# EAGLE board board-v3 (EAGLE 6.5.0)
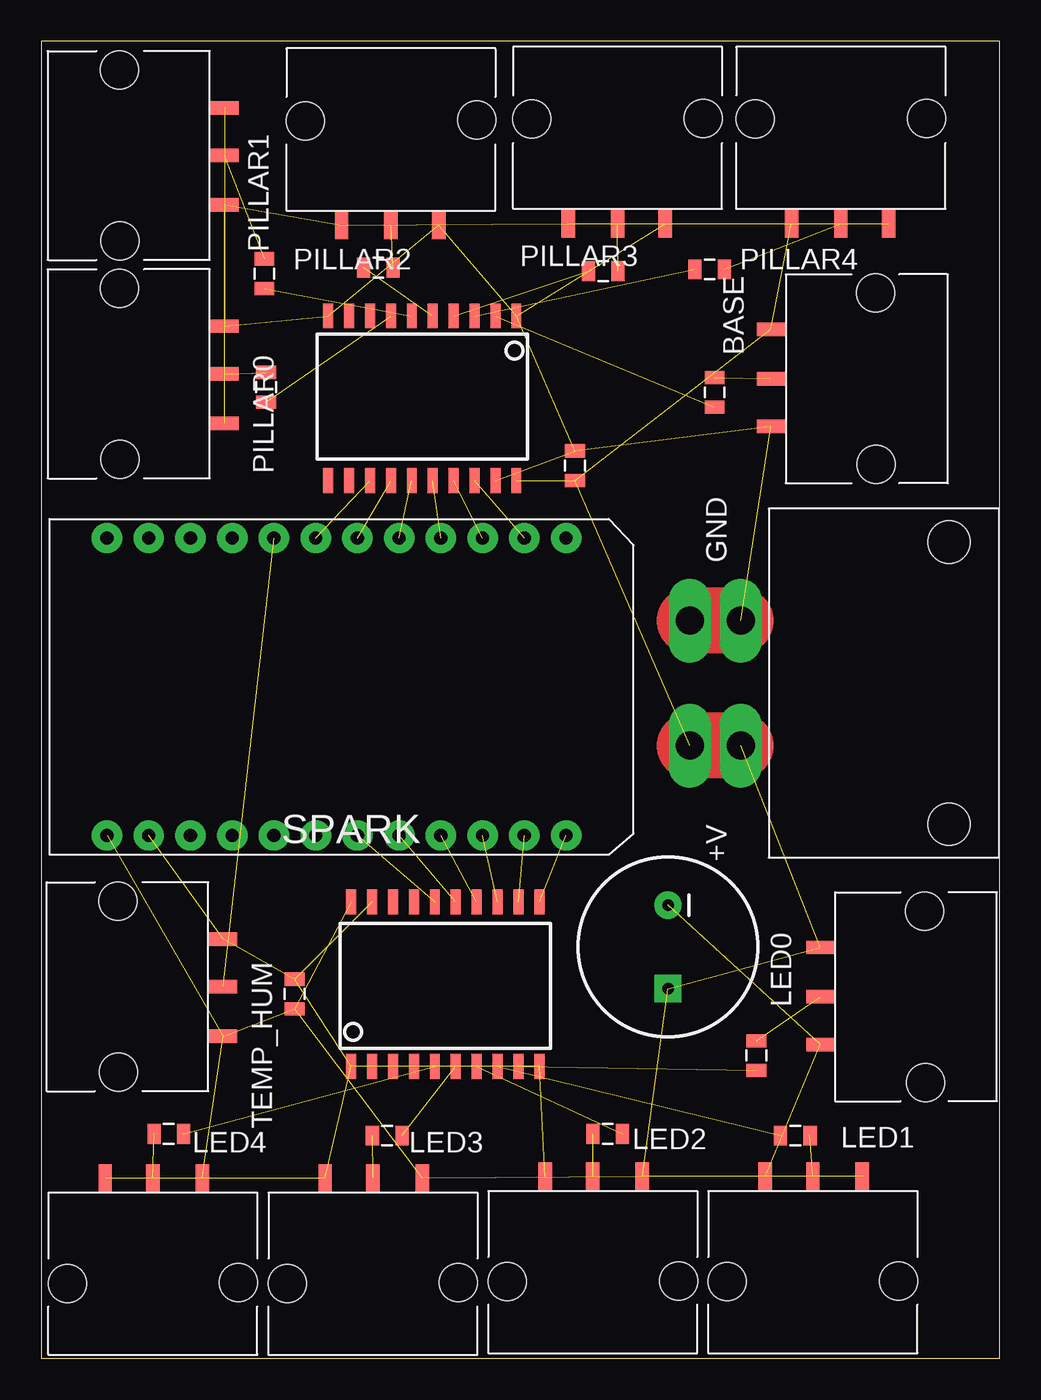
[diagram p0: board, top side]
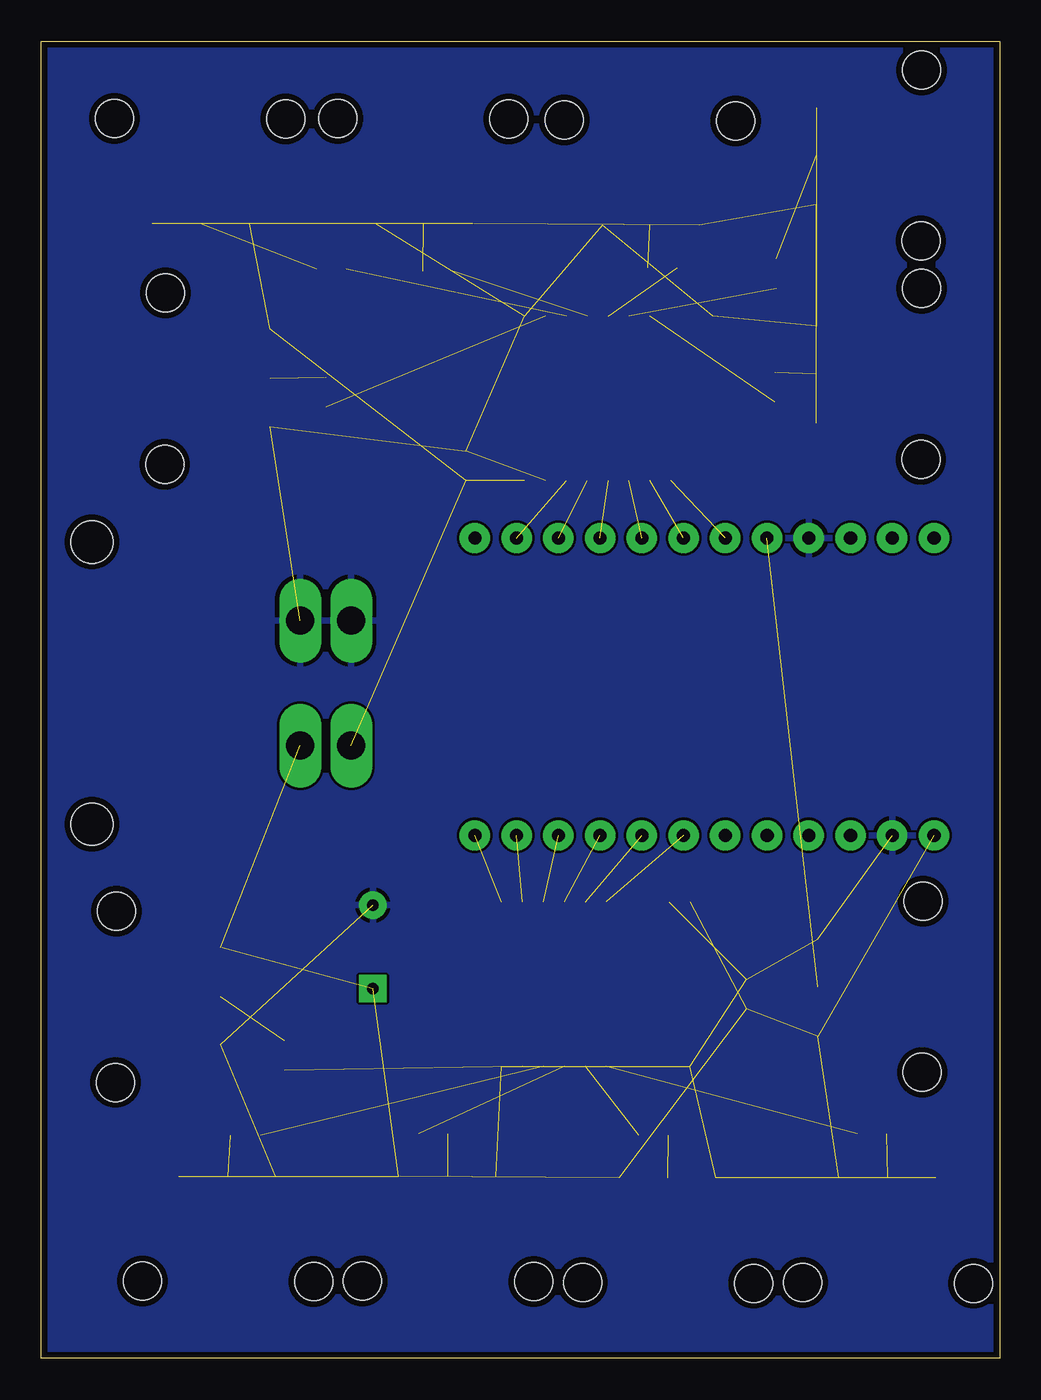
[diagram p1: board, bottom side, seen from below]

Size 58.26 x 80.04 mm. Coordinates in mm from the lower left corner, seen from the top.
Outline: 0,0 58.26,0 58.26,80.04 0,80.04 0,0
Copper layers (1*16): Top 0.0356mm / dielectric 1.5011mm / Bottom 0.0356mm
Design rules "OSH Park": minimum track width 6mil, minimum drill 13mil, track to track 6mil, track to pad 6mil, pad to pad 6mil, via to via 6mil, smd to smd 6mil, copper to edge 15mil, drill to drill 6mil, minimum pad ring 7mil, minimum via ring 7mil, stop-mask expansion 3mil, vias tented up to drill 0mil, thermal gap 10mil
Net classes: 1 power: width 3.556 mm

## Footprints (pad centres in the part's own frame; a part is rotated, then mirrored left to right if it is on the bottom)
MOLEX_3PIN_SMT_43650-310 = smd 0.813 x 1.676: DIN 6.35,-0.9; GND 9.25,-0.9; VCC 3.35,-0.9 | hole 2.3: 1.15,5.45; 11.55,5.5
CPOL-RADIAL-1000UF-25V = drill 0.7 pad 1.651 square: 1 2.54,0 | drill 0.7 pad 1.651: 2 -2.54,0
0805 = smd 0.8 x 1.2: 1 -0.9,0; 2 0.9,0
MOLEX_2PIN_SABRE_POWER = drill 1.7 pad 2.2 long: GND1 6.8,-1.7; GND2 6.8,-4.8; VCC1 14.4,-1.7; VCC2 14.4,-4.8 | hole 2.55: 2.025,10.95; 19.175,10.95
SOIC-20 = smd 0.6 x 1.5: 1 -5.715,-5; 2 -4.445,-5; 3 -3.175,-5; 4 -1.905,-5; 5 -0.635,-5; 6 0.635,-5; 7 1.905,-5; 8 3.175,-5; 9 4.445,-5; 10 5.715,-5; 11 5.715,5; 12 4.445,5; 13 3.175,5; 14 1.905,5; 15 0.635,5; 16 -0.635,5; 17 -1.905,5; 18 -3.175,5; 19 -4.445,5; 20 -5.715,5
SPARKCORE = drill 0.8 pad 1.85: 3V3 1.165,3.5; 3V3* 1.165,8.573; A0 19.235,31.399; A1 19.235,28.863; A2 19.235,26.327; A3 19.235,23.79; A4 19.235,21.254; A5 19.235,18.718; A6 19.235,16.182; A7 19.235,13.645; D0 1.165,31.399; D1 1.165,28.863; D2 1.165,26.327; D3 1.165,23.79; D4 1.165,21.254; D5 1.165,18.718; D6 1.165,16.181; D7 1.165,13.645; GND 19.235,6.036; GND2 1.165,11.109; RST 1.165,6.036; RX 19.235,11.109; TX 19.235,8.572; VIN 19.235,3.5

## Placement (x,y rotation side)
BASE  MOLEX_3PIN_SMT_43650-310  [MOLEX_3PIN_SMT_43650-310]  45.25,65.88 270 top
C1  1000uF  [CPOL-RADIAL-1000UF-25V]  38.1,25 270 top
C2  0.1uF  [0805]  15.4,22.14 90 top
C3  0.1uF  [0805]  32.45,54.24 90 top
LED0  MOLEX_3PIN_SMT_43650-310  [MOLEX_3PIN_SMT_43650-310]  48.24,28.32 270 top
LED1  MOLEX_3PIN_SMT_43650-310  [MOLEX_3PIN_SMT_43650-310]  53.25,10.16 180 top
LED2  MOLEX_3PIN_SMT_43650-310  [MOLEX_3PIN_SMT_43650-310]  39.88,10.16 180 top
LED3  MOLEX_3PIN_SMT_43650-310  [MOLEX_3PIN_SMT_43650-310]  26.51,10.06 180 top
LED4  MOLEX_3PIN_SMT_43650-310  [MOLEX_3PIN_SMT_43650-310]  13.14,10.06 180 top
PILLAR0  MOLEX_3PIN_SMT_43650-310  [MOLEX_3PIN_SMT_43650-310]  10.25,53.47 90 top
PILLAR1  MOLEX_3PIN_SMT_43650-310  [MOLEX_3PIN_SMT_43650-310]  10.25,66.74 90 top
PILLAR2  MOLEX_3PIN_SMT_43650-310  [MOLEX_3PIN_SMT_43650-310]  14.91,69.75 0 top
PILLAR3  MOLEX_3PIN_SMT_43650-310  [MOLEX_3PIN_SMT_43650-310]  28.68,69.85 0 top
PILLAR4  MOLEX_3PIN_SMT_43650-310  [MOLEX_3PIN_SMT_43650-310]  42.25,69.85 0 top
POWER  [MOLEX_2PIN_SABRE_POWER]  44.22,51.63 270 top
R1  470Ω  [0805]  43.46,18.4 90 top
R2  470Ω  [0805]  45.83,13.54 0 top
R3  470Ω  [0805]  34.43,13.64 180 top
R4  470Ω  [0805]  21.03,13.54 180 top
R5  470Ω  [0805]  7.76,13.64 180 top
R6  470Ω  [0805]  40.93,58.7 90 top
R7  470Ω  [0805]  13.67,59.01 90 top
R8  470Ω  [0805]  13.57,65.91 90 top
R9  470Ω  [0805]  20.49,66.27 0 top
R10  470Ω  [0805]  34.16,66.07 0 top
R11  470Ω  [0805]  40.63,66.17 0 top
SHIFT1  TI_74HCT245DWR  [SOIC-20]  24.56,22.74 0 top
SHIFT2  TI_74HCT245DWR  [SOIC-20]  23.16,58.34 180 top
SPARK  SPARKCORE  [SPARKCORE]  0.5,51.01 270 top
TEMP_HUM  MOLEX_3PIN_SMT_43650-310  [MOLEX_3PIN_SMT_43650-310]  10.16,16.23 90 top

## Library data of the parts
BASE LED0 LED1-LED4 PILLAR0 PILLAR1-PILLAR4 POWER SHIFT1 SHIFT2 SPARK TEMP_HUM = tjw
C1 R1-R11 = SparkFun-Passives
C2 C3 = SparkFun-Capacitors

## Nets
+5V [power]: BASE.VCC C1.1 C2.1 C3.1 LED0.VCC LED1.VCC LED2.VCC LED3.VCC LED4.VCC PILLAR0.VCC PILLAR1.VCC PILLAR2.VCC PILLAR3.VCC PILLAR4.VCC POWER.VCC1 POWER.VCC2 SHIFT1.20 SHIFT2.20 SPARK.VIN TEMP_HUM.VCC
GND [power]: BASE.GND C1.2 C2.2 C3.2 LED0.GND LED1.GND LED2.GND LED3.GND LED4.GND PILLAR0.GND PILLAR1.GND PILLAR2.GND PILLAR3.GND PILLAR4.GND POWER.GND1 POWER.GND2 SHIFT1.1 SHIFT1.10 SHIFT1.19 SHIFT2.1 SHIFT2.10 SHIFT2.19 SPARK.GND SPARK.GND2 TEMP_HUM.GND
N$1: SPARK.D7 TEMP_HUM.DIN
N$2: SHIFT2.17 SPARK.D2
N$3: PILLAR0.DIN R7.2
N$4: LED0.DIN R1.2
N$5: R1.1 SHIFT1.9
N$6: LED1.DIN R2.2
N$7: LED2.DIN R3.2
N$8: LED3.DIN R4.2
N$9: LED4.DIN R5.2
N$10: R6.1 SHIFT2.2
N$11: BASE.DIN R6.2
N$13: R11.1 SHIFT2.3
N$14: PILLAR1.DIN R8.2
N$15: R10.1 SHIFT2.4
N$16: PILLAR2.DIN R9.2
N$17: PILLAR3.DIN R10.2
N$18: PILLAR4.DIN R11.2
N$19: R2.1 SHIFT1.8
N$20: R3.1 SHIFT1.7
N$21: R4.1 SHIFT1.6
N$22: R5.1 SHIFT1.5
N$23: R9.1 SHIFT2.5
N$24: R8.1 SHIFT2.6
N$25: R7.1 SHIFT2.7
N$26: SHIFT2.13 SPARK.D6
N$30: SHIFT2.18 SPARK.D1
N$31: SHIFT2.16 SPARK.D3
N$32: SHIFT2.14 SPARK.D5
N$33: SHIFT2.15 SPARK.D4
N$34: SHIFT1.11 SPARK.A0
N$35: SHIFT1.12 SPARK.A1
N$36: SHIFT1.13 SPARK.A2
N$37: SHIFT1.14 SPARK.A3
N$38: SHIFT1.15 SPARK.A4
N$39: SHIFT1.16 SPARK.A5

## Tracks (layer width: path | path; a pad name or v marks a point on that pad's centre or on a via)
+5V  (18 unrouted)
  Top 4: POWER.VCC1 POWER.VCC2
GND  (20 unrouted)
  Top 4: POWER.GND1 POWER.GND2
  pour Bottom: -1.27,81.28 -1.27,-1.27 102.87,-1.27 102.87,82.55 0,82.55 -1.27,82.55
N$1  (1 unrouted)
N$2  (1 unrouted)
N$3  (1 unrouted)
N$4  (1 unrouted)
N$5  (1 unrouted)
N$6  (1 unrouted)
N$7  (1 unrouted)
N$8  (1 unrouted)
N$9  (1 unrouted)
N$10  (1 unrouted)
N$11  (1 unrouted)
N$13  (1 unrouted)
N$14  (1 unrouted)
N$15  (1 unrouted)
N$16  (1 unrouted)
N$17  (1 unrouted)
N$18  (1 unrouted)
N$19  (1 unrouted)
N$20  (1 unrouted)
N$21  (1 unrouted)
N$22  (1 unrouted)
N$23  (1 unrouted)
N$24  (1 unrouted)
N$25  (1 unrouted)
N$26  (1 unrouted)
N$30  (1 unrouted)
N$31  (1 unrouted)
N$32  (1 unrouted)
N$33  (1 unrouted)
N$34  (1 unrouted)
N$35  (1 unrouted)
N$36  (1 unrouted)
N$37  (1 unrouted)
N$38  (1 unrouted)
N$39  (1 unrouted)

## Text on the board
tNames: SPARK